# Altium PCB WOX.PcbDoc
Units mil, origin at the board's own origin, x right, y up, seen from the top; angles counter-clockwise.
Board outline 3465 x 2025 mil, 2 copper layers (Top Layer, Bottom Layer); 9 components, 12 nets, 67 pads, 0 vias.
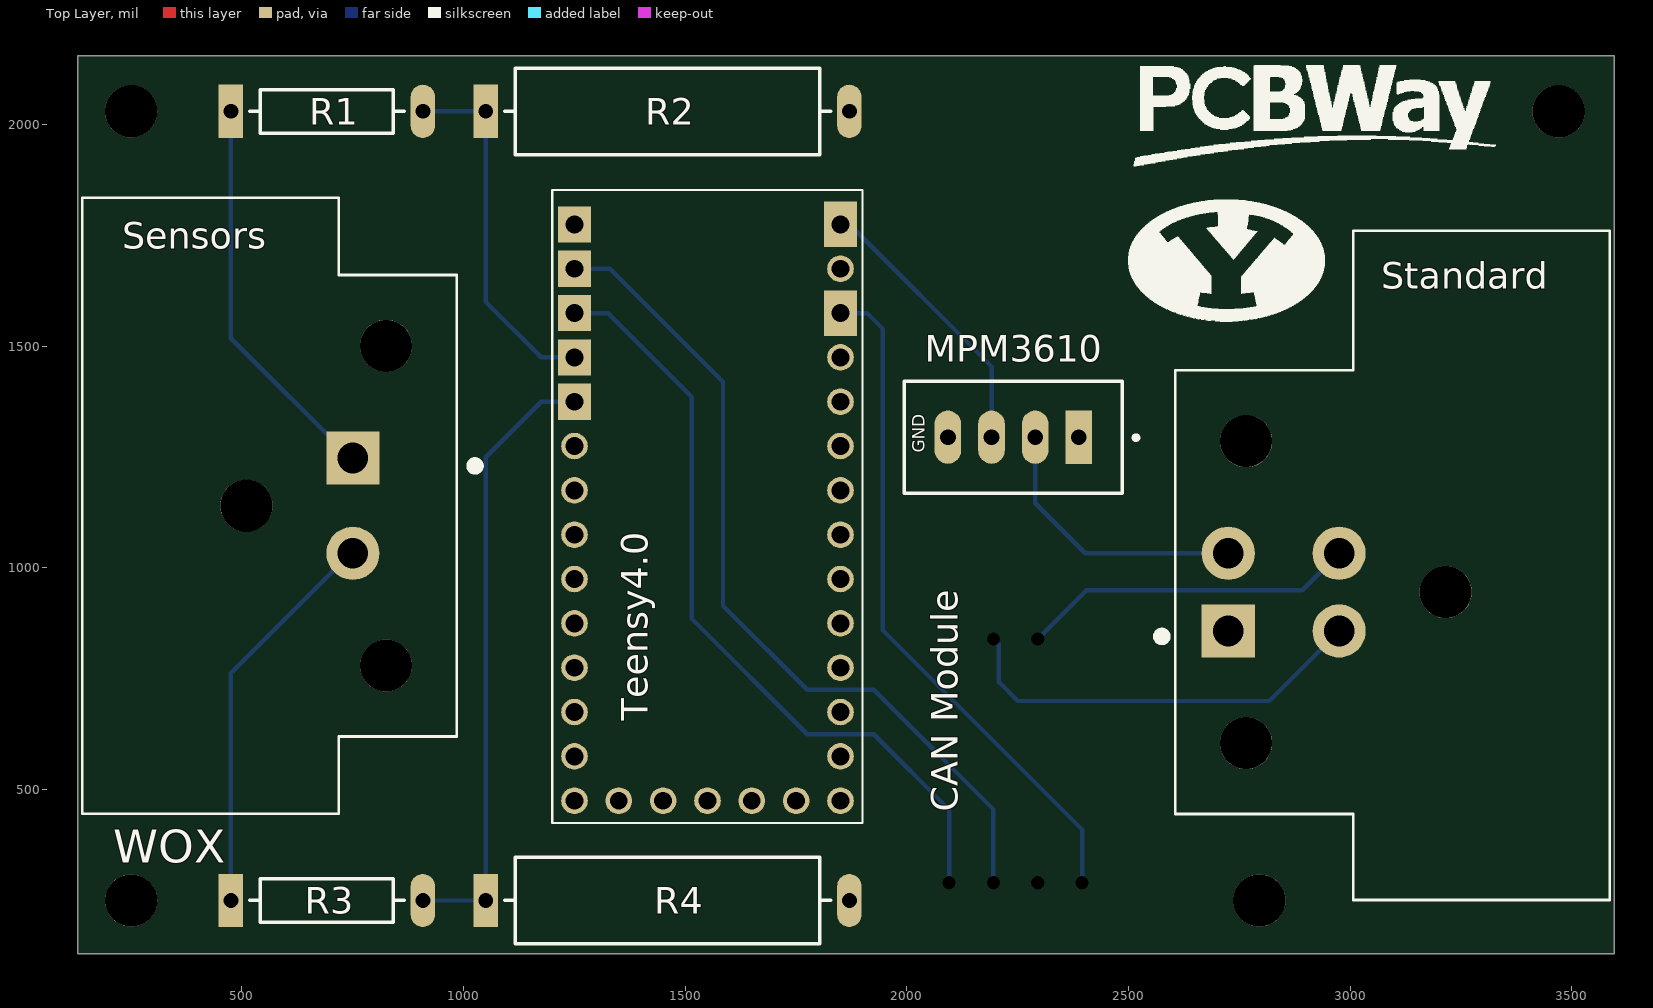
[diagram p0: Top Layer view]
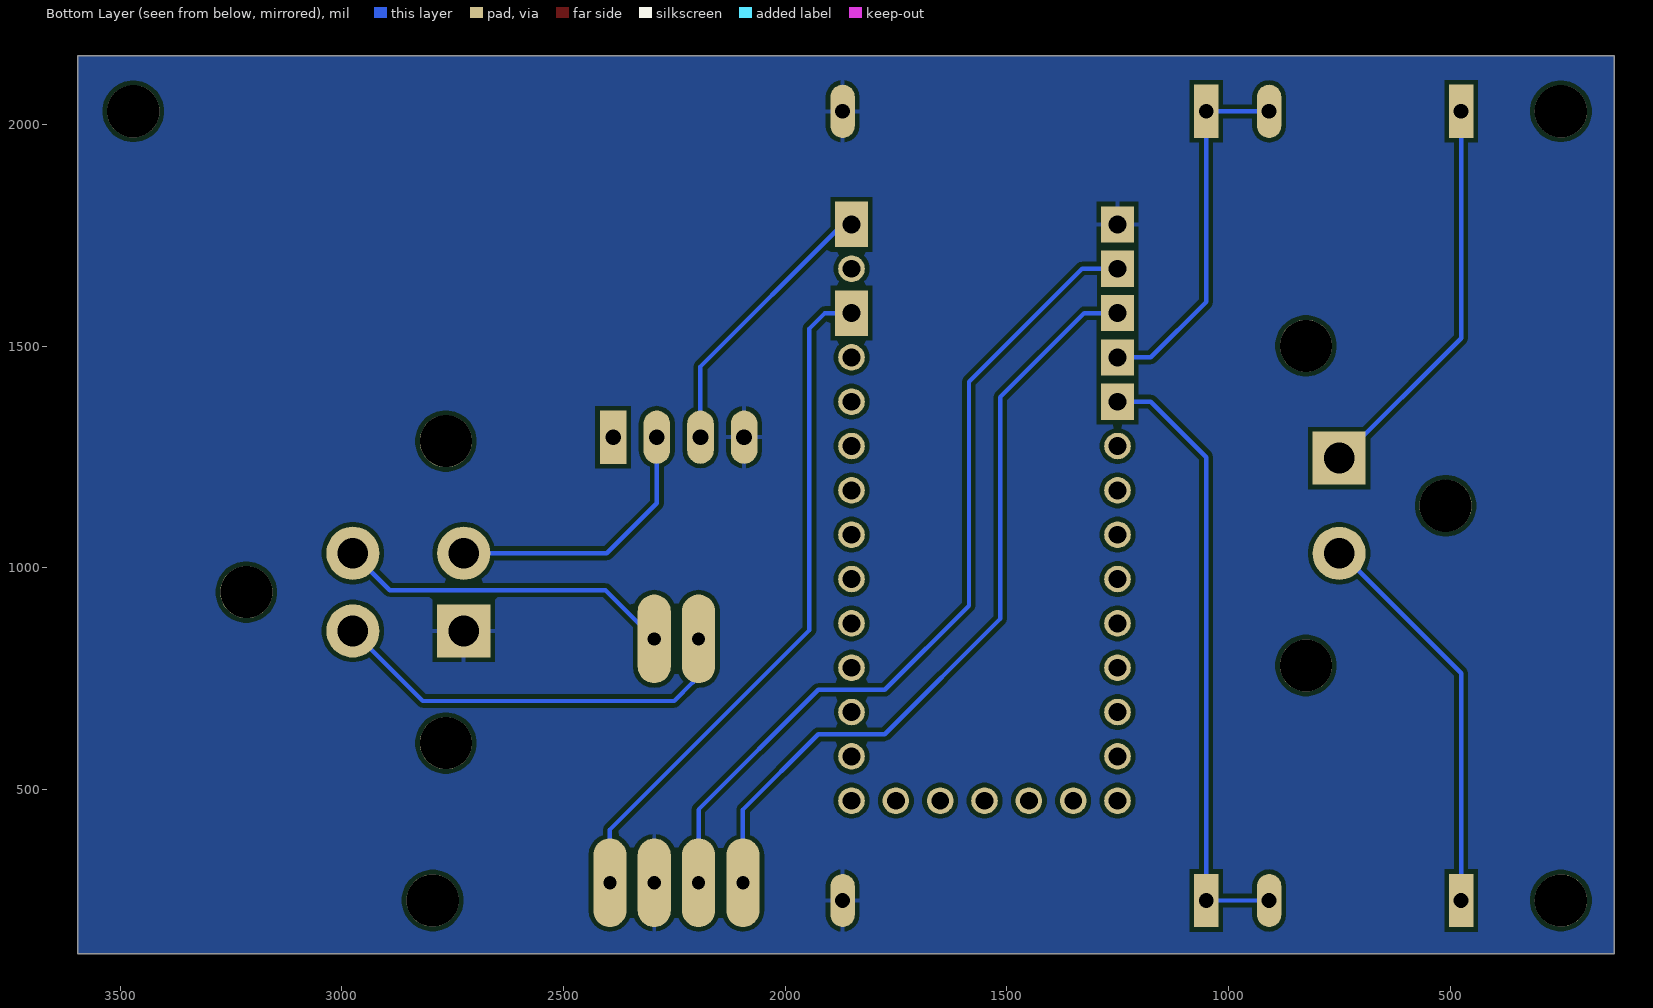
[diagram p1: Bottom Layer view, seen from below]
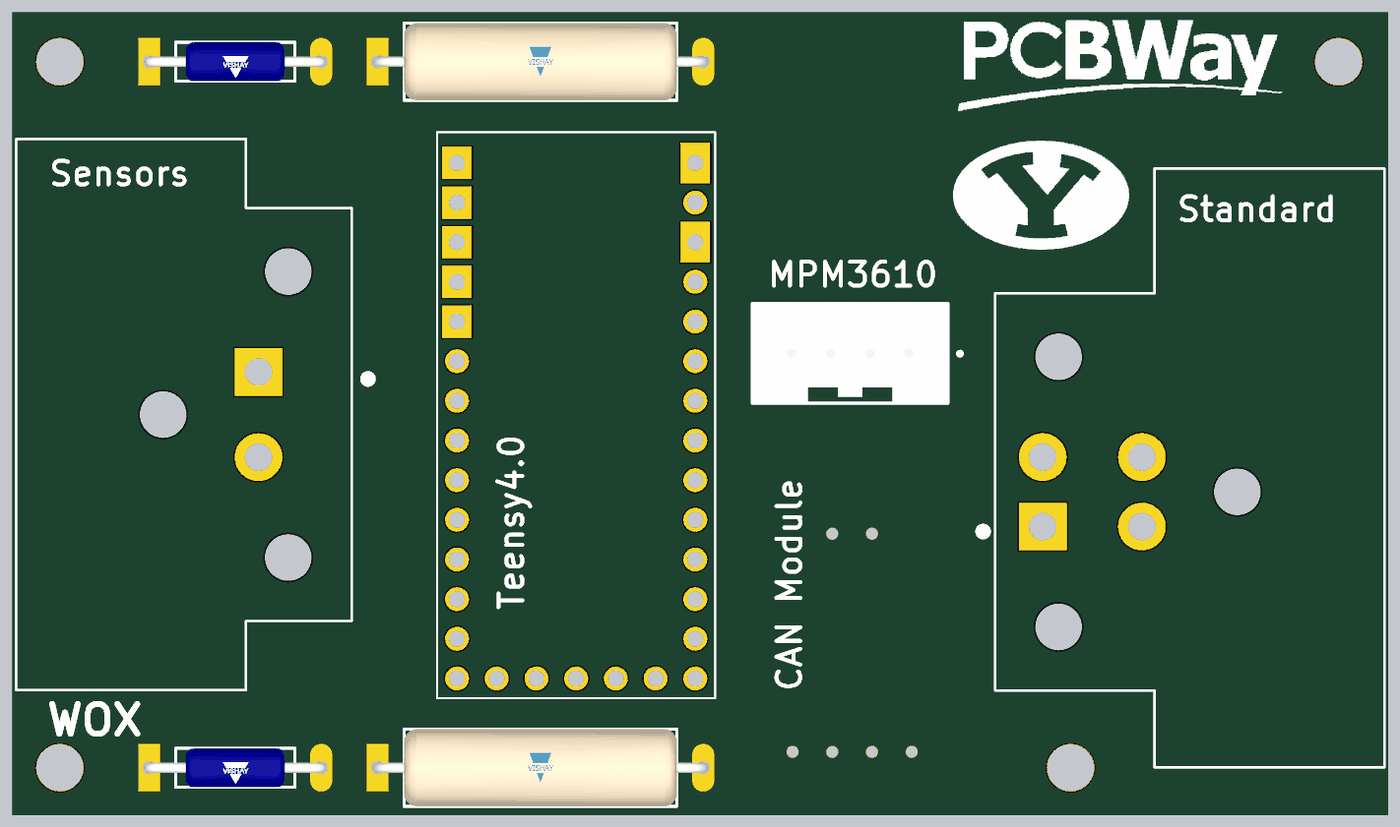
[diagram p2: 3D render of the assembled board from above, using the file's embedded part models]

## Layer stack, top to bottom
Top Solder: solder mask 0.4, Solder Resist, Dk 3.5
Top Layer: signal copper 1.4
Dielectric 1: dielectric 12.6, FR-4, Dk 4.8
Bottom Layer: signal copper 1.4
Bottom Solder: solder mask 0.4, Solder Resist, Dk 3.5

## Board outline
130,130 3595,130 3595,2155 130,2155

## Design rules (kind name [scope] priority, off if disabled: settings)
Clearance [All] p1: gap=10 ignorepadtopadclearanceinfootprint=FALSE
HoleSize [All] p1: absolutevalues=TRUE maxlimit=200 minlimit=1 maxpercent=80.000 minpercent=20.000
PolygonConnect [All] p1: connectstyle=Relief reliefconductorwidth=10 reliefentries=4 polygonreliefangle="90 Angle" airgapwidth=10
RoutingVias [All] p1: holewidth=28 width=50 viastyle="Through Hole" minholewidth=28 minwidth=50 maxholewidth=28 maxwidth=50
SolderMaskExpansion [All] p1: expansion=4 istentingtop=FALSE
SupplyNets "Schematic Supply Nets" [InNet('GND')] p1: voltage=0.000
Width [All] p1: maxlimit=20 minlimit=10 preferedwidth=12 minimp=50.000000 maximp=50.000000 favimp=50.000000
29 further rules are at their usual default settings.

## Components (designator, comment, footprint, x,y, rotation, side; value= is the part's Value field where it differs from the comment)
"CAN Module" "CAN Module" "CAN Module-Footprint-1" 2395,290 r90 top locked
MPM3610 "B04B-XASK-1(LF)(SN)" FP-B04B-XASK-1_LF_SN-MFG 2240,1295 r0 top locked
R1 "10kΩ" FP-RLR07-MFG 691.54,2030 r0 top locked
R2 "3kΩ" FP-RNC65-MFG 1460.04,2030 r0 top locked value=3.01kΩ
R3 "10kΩ" FP-RLR07-MFG 691.54,250 r0 top locked
R4 "3kΩ" FP-RNC65-MFG 1460.04,250 r0 top locked value=3.01kΩ
Sensors "DT13-2P" TE_DT13-2P 750.2,1140.43 r0 top locked
Standard "DT13-4P" TE_DT13-4P 2974.84,945.55 r180 top locked
Teensy4.0 "DEV-15583" MODULE_DEV-15583 1550,1125 r0 top locked

## Footprints (in the part's own frame and the unit in brackets; to place one, negate y for a bottom-side part, rotate by r counter-clockwise, add the part's x,y. Pads: shape width x height; smd on the part's side, far side on the other; paste and mask are expansions set on the pad)
"CAN Module-Footprint-1" [mil]
  round 0 / inner round 60 / far side oval 200x75 hole 30: 1(0,300) 2(0,200) 3(0,100) 4(0,0) 5(550,200) 6(550,100)
FP-B04B-XASK-1_LF_SN-MFG [mil]
  rect 60x120 hole 35.43 paste-99999 mask+0: 1(147.64,0)
  oval 60x120 hole 35.43 paste-99999 mask+0: 2(49.21,0) 3(-49.21,0) 4(-147.64,0)
  silkscreen extent -246,-126 281,126, body extent -250,-130 250,130, height 10
FP-RLR07-MFG [mil]
  rect 55x120 hole 33.46 paste-99999 mask+0: 1(-216.54,0)
  oval 55x120 hole 33.46 paste-99999 mask+0: 2(216.54,0)
  silkscreen extent -174,-49 174,49, body extent -247,-53 247,53, height 10
FP-RNC65-MFG [mil]
  rect 55x120 hole 33.46 paste-99999 mask+0: 1(-410.04,0)
  oval 55x120 hole 33.46 paste-99999 mask+0: 2(410.04,0)
  silkscreen extent -368,-97 368,97, body extent -441,-101 441,101, height 10
MODULE_DEV-15583 [mil]
  rect 74.5x81.5 hole 40.16: 0(-300,550) 1(-300,450) 2(-300,350) 3(-300,250) G1(-300,650)
  round 60 hole 40.16: 3.3V_1(-100,-650) 4(-300,150) 5(-300,50) 6(-300,-50) 7(-300,-150) 8(-300,-250) 9(-300,-350) 10(-300,-450) 11(-300,-550) 12(-300,-650) 13(300,-650) 14(300,-550) 15(300,-450) 16(300,-350) 17(300,-250) 18(300,-150) 19(300,-50) 20(300,50) 21(300,150) 22(300,250) 23(300,350) G2(0,-650) G3(300,550) ON-OFF(200,-650) PGM(100,-650) VBAT(-200,-650)
  rect 74.5x102.5 hole 40.16: 3.3V_2(300,450) VIN(300,650)
  silkscreen extent -350,-700 350,728
TE_DT13-2P [mm]
  rect 3.048x3.048 hole 1.76: 1(0,2.73)
  round 3.048 hole 1.76: 2(0,-2.73)
  round 2.99 hole 2.99 unplated: ""(-6.1,0) ""(1.9,-9.155) ""(1.9,9.155)
  silkscreen extent -15.5,-17.65 7.25,17.65
TE_DT13-4P [mm]
  rect 3.048x3.048 hole 1.76: 1(6.35,2.225)
  round 3.048 hole 1.76: 2(6.35,-2.225) 3(0,-2.225) 4(0,2.225)
  round 2.99 hole 2.99 unplated: ""(-6.1,0) ""(5.33,8.65) ""(5.33,-8.65)
  silkscreen extent -15.5,-20.71 10.41,17.64

## Part data
"CAN Module": library part CMP-00030-00003-1, "CAN waveshare"
MPM3610: library part CMP-17439-000018-1, "CONN HEADER VERT 4POS 2.5MM", Current Rating=3A, Manufacturer=JST, Temperature="-25°C to +85°C", Temperature Range High=+85°C, Temperature Range Low=-25°C, Voltage Rating=250V, Automotive=No, Category=Conn, ComponentLink2Description=Datasheet, ComponentLink2URL=http://www.jst-mfg.com/product/pdf/eng/eXA1.pdf, Conn Gender=Male, Conn Orientation=Straight, Contact Material=Tin,Copper, Device Class L1=Connectors, Device Class L2="Headers and Wire Housings", Device Class L3=unset, Digikey Description="CONN HEADER VERT 4POS 2.5MM", Height=8.8mm, Lead Free=Yes, Manufacturer Part Number=B04B-XASK-1(LF)(SN), Number Of Contacts=4, Number Of Rows=1, Octopart=https://octopart.com/b04b-xask-1%28lf%29%28sn%29-jst-3990149, Package=B04B-XASK-1(LF)(SN), Pitch=2.5mm, RoHS=TRUE
R1 R3: library part CMP-00030-39449004-1, "RLR07C1002FSB14 Fixed Resistor, Metal Film, 0.25W, 10000ohm, 250V, 1% +/-Tol, 100ppm/Cel, Through Hole Mount", Case/Package=Conformal, Max Operating Temperature=150°C, Max Power Dissipation=250mW, Min Operating Temperature=-65°C, Temperature Coefficient=100ppm/°C, Tolerance=1%, Voltage Rating=250V, Composition="Metal Film", Contact Plating="Lead, Tin", Diameter=2.29mm, Failure Rate=0.001%, Features="Military, Moisture Resistant, Weldable", Lead Diameter=640µm, Lead Free="Contains Lead", Lead Length=38.1mm, Length=7.62mm, Military Standard=MIL-PRF-39017, Mount="Through Hole", NexarPartId=39449004, Number of Pins=14, Number of Terminations=2, Packaging=Bulk, Power Rating=250mW, Radiation Hardening=No, REACH SVHC=Unknown, Resistance=10kΩ, RoHS=Non-Compliant, Schedule B="8533210090, 8533210090", Termination=Axial, Voltage Rating (DC)=250V, Width=2.29mm, Wire/Cable Diameter=50.8µm
R2 R4: library part CMP-02408-000008-1, "Res Metal Film 3.01K Ohm 1% 0.5W(1/2W) ±50ppm/C 0.01% Epoxy AXL T/R", Manufacturer=Vishay, Manufacturer Part Number=RNC65H3011FRB14, Package=RNC65, Power Rating=0.5W, Resistance=3.01kΩ, Temperature="-65°C to +175°C", Temperature Coefficient=50ppm/°C, Temperature Range High=+175°C, Temperature Range Low=-65°C, Tolerance=1%, Voltage Rating=300V, Automotive=No, Category=Res, ComponentLink2Description=Datasheet, ComponentLink2URL=https://www.vishay.com/docs/31025/erc.pdf, Composition="Metal Film", Device Class L1="Passive Components", Device Class L2=Resistors, Device Class L3="Through-Hole Resistors", Height=4.95mm, Ipc Land Pattern Name=RESAD2083W85L1745D495, Lead Free=Yes, Military Standard=true, Octopart=https://octopart.com/rnc65h3011frb14-vishay-40281131, RoHS=TRUE, Series=RNC
Sensors: "DT13 Series, 5.46mm Pitch 2 Way 1 Row Right Angle PCB Header, Solder Termination", Package=None, Availability=Unavailable, DigiKey-Purchase-URL=https://snapeda.com/shop?store=DigiKey&id=1788306, EU_RoHS_Compliance=Compliant, MF="TE Connectivity", MP=DT13-2P, Price=None, SnapEDA_Link=https://www.snapeda.com/parts/DT13-2P/TE%20Connectivity%20Deutsch%20Connectors/view-part/1788306/?ref=snap
Standard: "DT13 Series, 4.44mm Pitch 4 Way 2 Row Right Angle PCB Header, Solder Termination", Package=None, Availability=Unavailable, MF="TE Connectivity", MP=DT13-4P, Price=None, SnapEDA_Link=https://www.snapeda.com/parts/DT13-4P/TE%20Connectivity%20Deutsch%20Connectors/view-part/2708791/?ref=snap, TE_purchase_URL=https://www.te.com/usa-en/product-DT13-4P.html?te_bu=Cor&te_type=disp&te_campaign=seda_glo_cor-seda-global-disp-prtnr-fy19-seda-model-bom-cta_sma-317_1&elqCampaignId=32493
Teensy4.0: "RT1062 Teensy 4.0 i.MX ARMÂ® CortexÂ®-M7 MPU Embedded Evaluation Board", Package=None, Digi-Key_Part_Number=1568-DEV-15583-ND, Digi-Key_Purchase_URL=https://www.digikey.com/product-detail/en/sparkfun-electronics/DEV-15583/1568-DEV-15583-ND/10384551?utm_source=snapeda&utm_medium=aggregator&utm_campaign=symbol, MF="SparkFun Electronics", MP=DEV-15583, SnapEDA_Link=https://www.snapeda.com/parts/DEV-15583/SparkFun%20Electronics/view-part/4001229/?ref=snap

## Free pads (board coordinates)
  round 118.11 hole 118.11: 1(250,250) 2(2795,250) 3(3470,2030) 4(250,2030)

## Nets (pads, with @x,y where several pads share a name; then routed paths per layer and width w, separated by ;. In a path a pad name is that pad's centre, name@x,y a point inside that pad or via, vN(x,y) a via of type N, cw(c..) or ccw(c..) an arc to the next point about the centre after c; other vN are vias at no path point)
3.3V: "CAN Module.4" Teensy4.0.3.3V_2 | length 1545.9
  Bottom Layer w10: Teensy4.0.3.3V_2 1910,1575 1945,1540 1945,860 2395,410 2395,290
5V: MPM3610.3 Teensy4.0.VIN | length 612.9
  Bottom Layer w10: Teensy4.0.VIN@1870,1775 2190.79,1454.21 MPM3610.3
12V: MPM3610.2 Standard.2 | length 631.5
  Bottom Layer w10: MPM3610.2 2289.21,1145.79 2401.85,1033.15 Standard.2
CANH: "CAN Module.5" Standard.4 | length 953.1
  Bottom Layer w10: 2195,840 2207.44,827.56 2207.44,742.56 2250,700 2816.89,700 Standard.4
CANL: "CAN Module.6" Standard.3 | length 759.8
  Bottom Layer w10: 2295,840 2405,950 2891.69,950 Standard.3
CRX2: "CAN Module.2" Teensy4.0.0 | length 1911.2
  Bottom Layer w10: Teensy4.0.0 1330,1675 1585,1420 1585,915 1775,725 1925,725 2195,455 2195,290
CTX2: "CAN Module.1" Teensy4.0.1 | length 1766.8
  Bottom Layer w10: Teensy4.0.1 1325,1575 1515,1385 1515,885 1775,625 1925,625 2095,455 2095,290
GND: "CAN Module.3" MPM3610.4 R2.2 R4.2 Standard.1 Teensy4.0.G1
"S1 2.8V": R1.2 R2.1 Teensy4.0.2 | length 823.7
  Bottom Layer w10: R1.2 R2.1 1050,1600 1175,1475 Teensy4.0.2
"S1 12V": R1.1 Sensors.1 | length 894
  Bottom Layer w10: R1.1 475,1518.11 Sensors.1@745.2,1247.91
"S2 2.8V": R3.2 R4.1 Teensy4.0.3 | length 1393.7
  Bottom Layer w10: R3.2 R4.1 1050,1250 1175,1375 Teensy4.0.3
"S2 12V": R3.1 Sensors.2 | length 894.9
  Bottom Layer w10: R3.1 475,762.76 Sensors.2@745.2,1032.95
pads on no net: MPM3610.1 Sensors. Standard. Teensy4.0.3.3V_1 Teensy4.0.4 Teensy4.0.5 Teensy4.0.6 Teensy4.0.7 Teensy4.0.8 Teensy4.0.9 Teensy4.0.10 Teensy4.0.11 Teensy4.0.12 Teensy4.0.13 Teensy4.0.14 Teensy4.0.15 Teensy4.0.16 Teensy4.0.17 Teensy4.0.18 Teensy4.0.19 Teensy4.0.20 Teensy4.0.21 Teensy4.0.22 Teensy4.0.23 Teensy4.0.G2 Teensy4.0.G3 Teensy4.0.ON-OFF Teensy4.0.PGM Teensy4.0.VBAT

## Polygon pours and split planes (outlines as drawn)
GND on Bottom Layer "GND" (solid, pour order 1): 130,130 3595,130 3595,2155 130,2155

## Silkscreen, mask and mechanical layers (free items; w line width, h text height)
Top Overlay:
  drawing of 7 lines, arcs and shapes, not listed
  text "WOX" at 210,335 h75

## Text inside footprints (layer, text, board x,y; h text height)
Teensy4.0: Top Overlay "GND" at 2040,1260 h28 r90